# Altium PCB ProximityDetector.PcbDoc
Units mm, origin at the board's own origin, x right, y up, seen from the top; angles counter-clockwise.
Board outline 150.24 x 150.5 mm, 2 copper layers (Top Layer, Bottom Layer); 12 components, 9 nets, 33 pads, 1 vias.
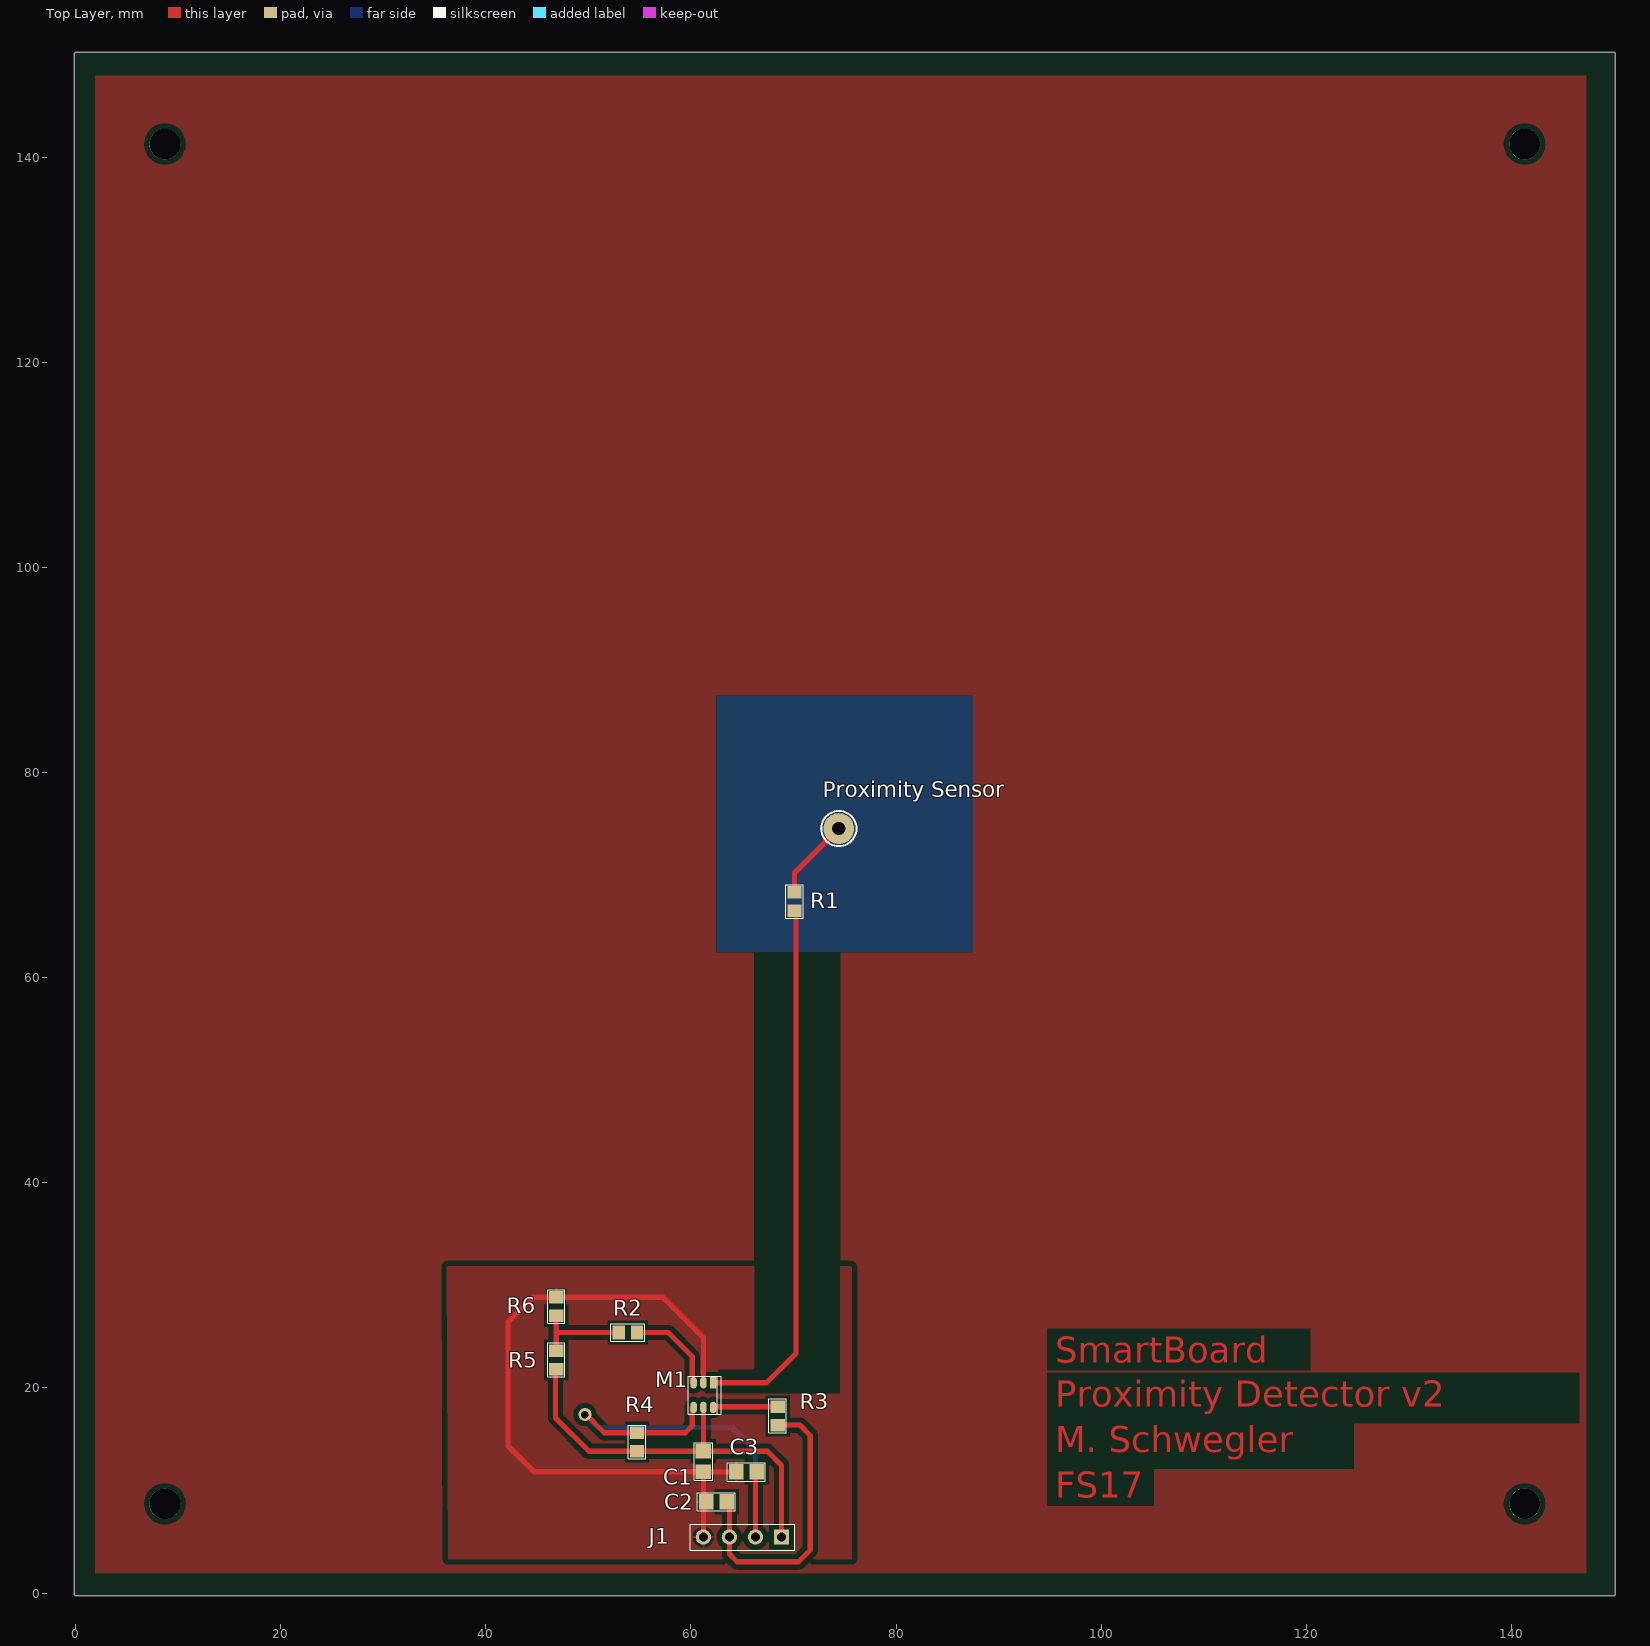
[diagram p0: Top Layer view]
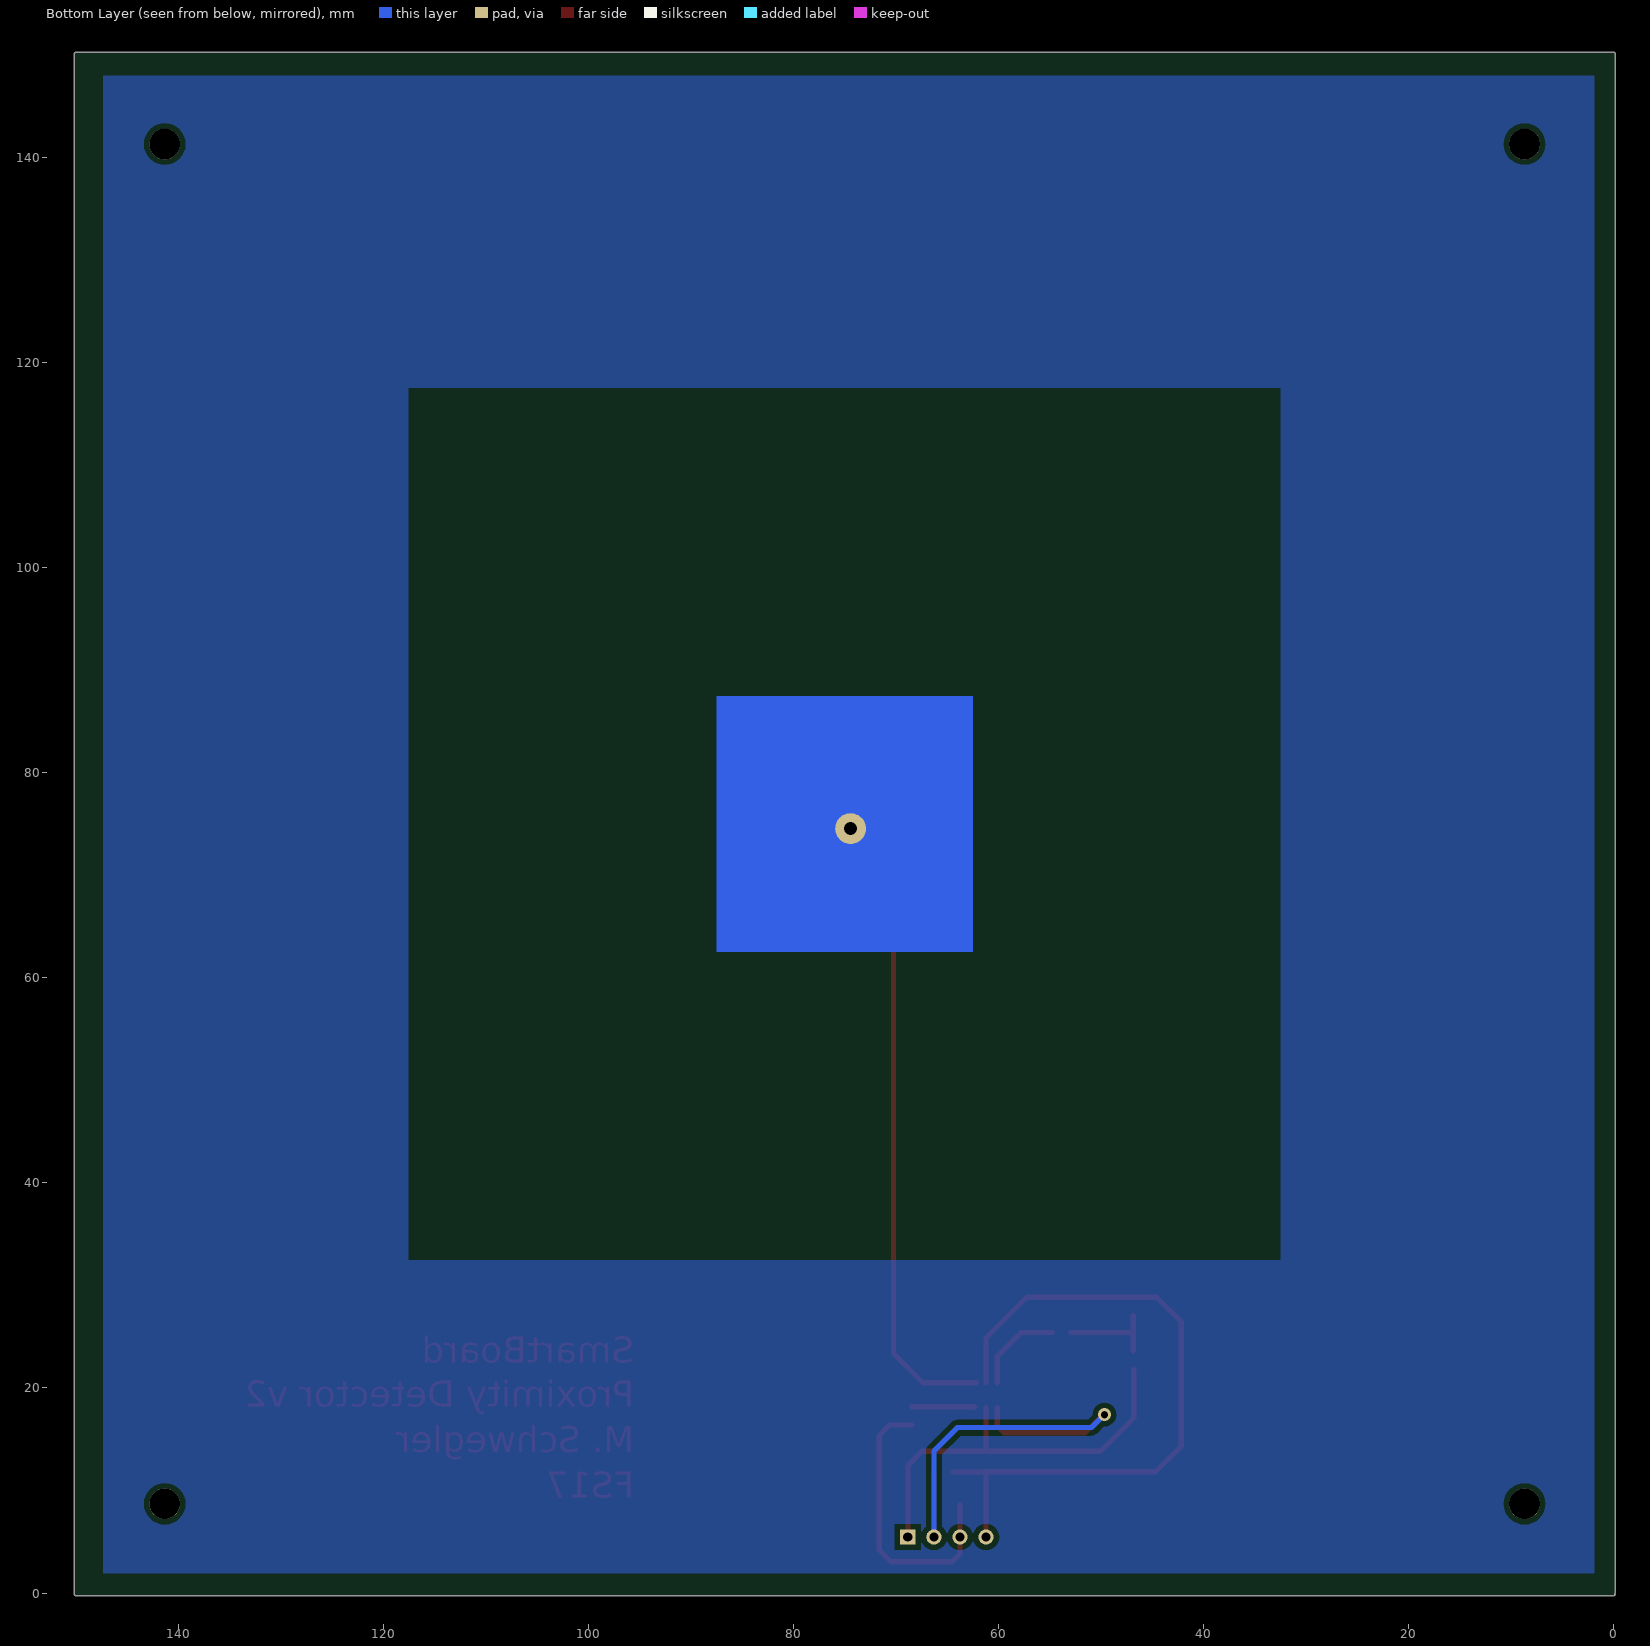
[diagram p1: Bottom Layer view, seen from below]
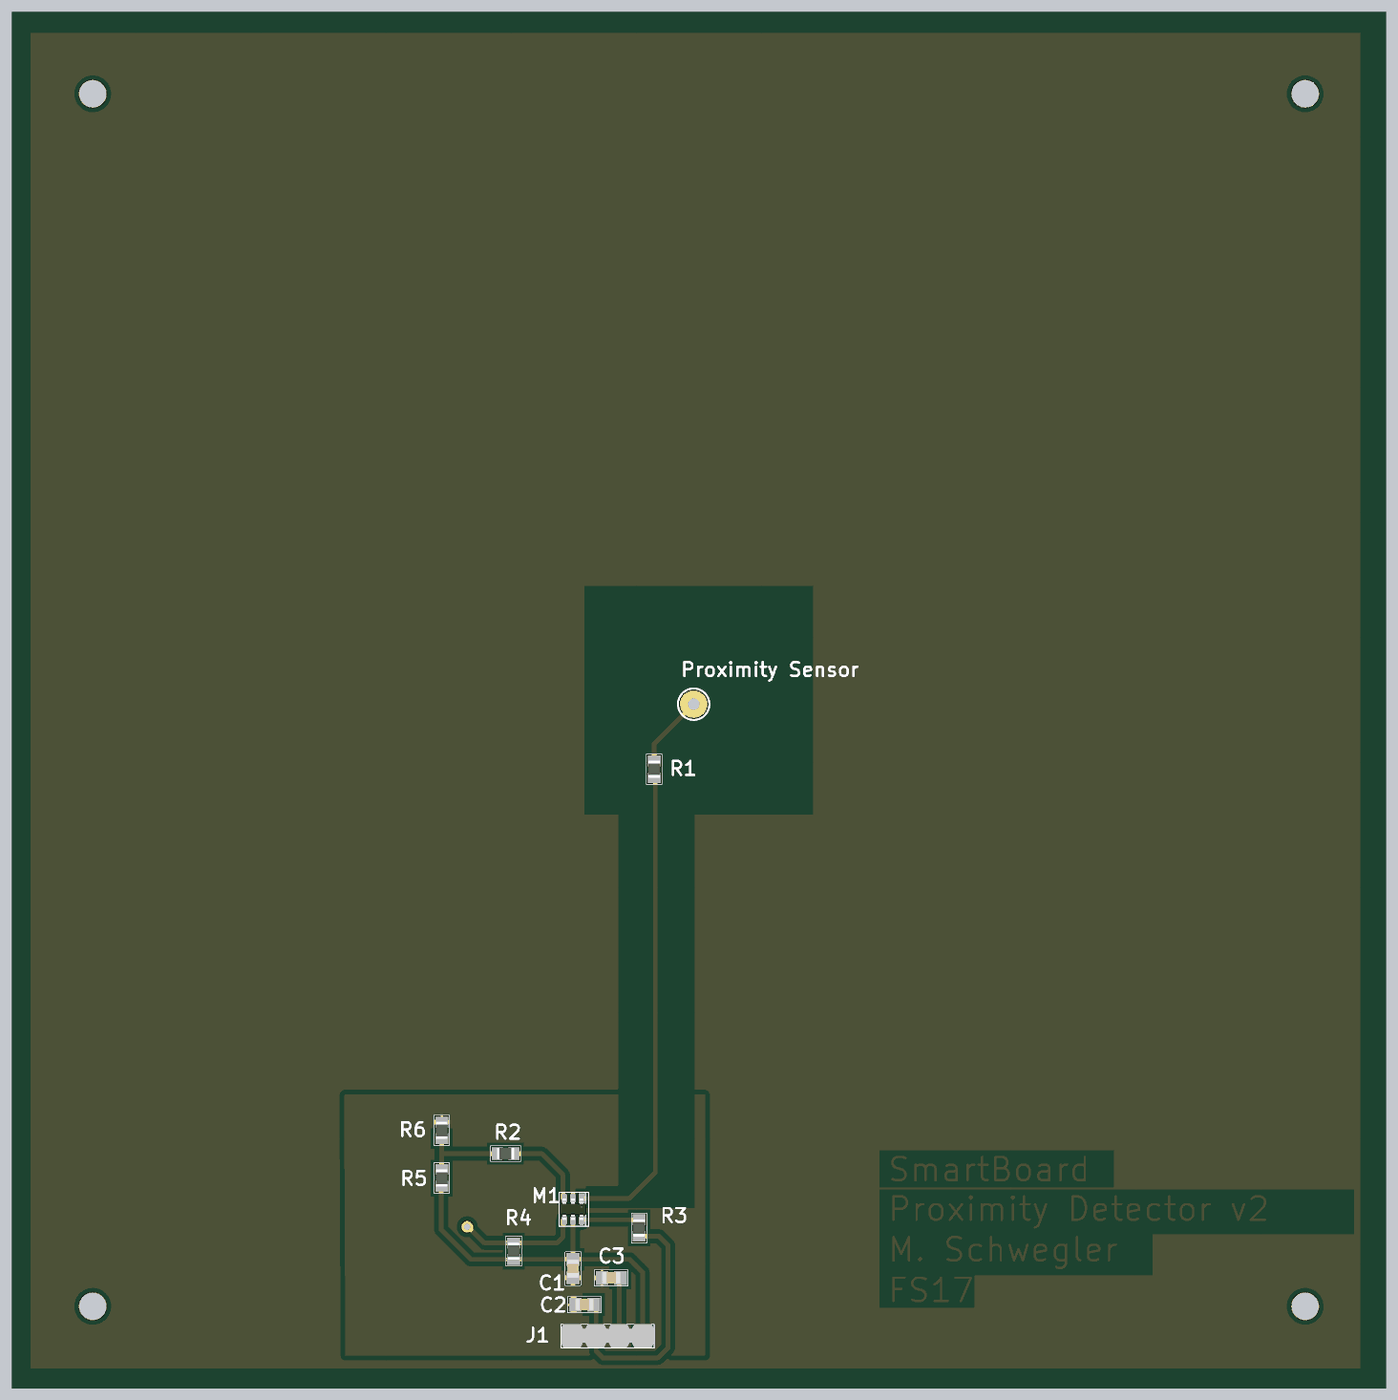
[diagram p2: 3D render of the assembled board from above, using the file's embedded part models]

## Layer stack, top to bottom
Top Solder: solder mask 0.0102, Solder Resist, Dk 3.5
Top Layer: signal copper 0.0356
Dielectric 1: dielectric 0.32, FR-4, Dk 4.8
Bottom Layer: signal copper 0.0356
Bottom Solder: solder mask 0.0102, Solder Resist, Dk 3.5

## Board outline
-0.11,-0.064 cw(c0,0) -0.127,0 -0.127,150.114 cw(c0,150.114) 0,150.241 149.987,150.241 cw(c149.987,150.114) 150.114,150.114 150.114,-0.127 cw(c149.987,-0.127) 149.987,-0.254 0,-0.254 cw(c0,-0.127)

## Design rules (kind name [scope] priority, off if disabled: settings)
Clearance [All] p1: gap=0.508
PolygonConnect [All] p1: connectstyle=Relief reliefconductorwidth=0.254 reliefentries=4 polygonreliefangle="90 Angle" airgapwidth=0.254
RoomDefinition ProximityDetector [InComponentClass('ProximityDetector')] p1: confinementstyle=ConfineIn formatcopy=TRUE lockcomponents=FALSE outline 0,0 149.987,0 149.987,149.987 0,149.987
RoutingVias [All] p1: holewidth=0.711 width=1.27 viastyle="Through Hole" minholewidth=0.711 minwidth=1.27 maxholewidth=0.711 maxwidth=1.27
SolderMaskExpansion [All] p1: expansion=0.102
UnpouredPolygon [All] p1: allowunpoured=FALSE
Width [All] p1: maxlimit=0.508 minlimit=0.508 preferedwidth=0.508
29 further rules are at their usual default settings.

## Components (designator, comment, footprint, x,y, rotation, side; value= is the part's Value field where it differs from the comment)
C1 "100n" 0805_C 61.214,12.827 r90 top
C2 "10p" 0805_C 62.484,8.89 r0 top
C3 "10p" 0805_C 65.405,11.811 r0 top
J1 "Value" CON_THT_4P_RM2.54 65.024,5.461 r180 top
M1 "MTCH101" SOT23-6 61.214,19.304 r270 top
"Proximity Sensor" "Detector" Hole_1.3mm 74.422,74.549 r90 top
R1 "4.7k" 0805_R 70.104,67.437 r270 top
R2 "10k" 0805_R 53.848,25.4 r0 top
R3 "4.7k" 0805_R 68.453,17.272 r270 top
R4 "4.7k" 0805_R 54.737,14.732 r270 top
R5 "220k" 0805_R 46.863,22.733 r270 top
R6 "220k" 0805_R 46.863,27.94 r270 top

## Footprints (in the part's own frame and the unit in brackets; to place one, negate y for a bottom-side part, rotate by r counter-clockwise, add the part's x,y. Pads: shape width x height; smd on the part's side, far side on the other; paste and mask are expansions set on the pad)
0805_C [mm] "Chip Capasitor - 0805 Medium"
  rect 1.4x1.5 smd: 1(-1,0) 2(1,0)
  silkscreen extent -1.85,-0.89 1.84,0.87, body extent -1,-0.62 1,0.62, height 0.59
0805_R [mm] "Chip Resistor - 0805 Normal"
  rect 1.2x1.4 smd: 1(-0.9,0) 2(0.9,0)
  silkscreen extent -1.65,-0.85 1.65,0.85, body extent -0.95,-0.65 0.95,0.65, height 0.63
CON_THT_4P_RM2.54 [mm] "Connector; Header; 6 Position"
  rect 1.5x1.5 hole 0.9: 1(-3.81,0)
  round 1.5 hole 0.9: 2(-1.27,0) 3(1.27,0) 4(3.81,0)
  silkscreen extent -5.08,-1.27 5.09,1.3, body extent -5.05,-1.3 5.11,1.24, height 9.27
Hole_1.3mm [mm] "Mechanical hole, 1.3 mm, 3 mm pad appature"
  round 3 hole 1.3: 1(0,0)
  silkscreen extent -1.72,-1.72 1.72,1.72
SOT23-6 [mm] "SOT23, 6-Leads, Body 2.9x1.6mm, Pitch 0.95mm, Lead Span 2.8mm, IPC Medium Density"
  rect 1.1x0.65 smd: 1(-1.2,0.95)
  oval 1.1x0.65 smd: 2(-1.2,0) 3(-1.2,-0.95) 4(1.2,-0.95) 5(1.2,0) 6(1.2,0.95)
  silkscreen extent -1.85,-1.49 1.85,1.75, body extent -1.19,-1.46 1.15,1.47, height 1

## Part data
C1 C2 C3: library part Cap, "Cap"
J1: library part CON_4P
R1 R2 R3 R4 R5 R6: library part Res, "Res"

## Free pads (board coordinates)
  round 3 hole 3: 1(8.7,8.7) 1(8.7,141.3) 1(141.3,8.7) 1(141.3,141.3)

## Via types
v1: diameter 1.27, hole 0.711, Top Layer to Bottom Layer, 1 vias

## Nets (pads, with @x,y where several pads share a name; then routed paths per layer and width w, separated by ;. In a path a pad name is that pad's centre, name@x,y a point inside that pad or via, vN(x,y) a via of type N, cw(c..) or ccw(c..) an arc to the next point about the centre after c; other vN are vias at no path point)
3V3: C1.2 J1.1 M1.5 R4.2 R5.2 | length 39.9
  Top Layer w0.508: R5.2@46.799,21.769 46.799,17.081 50.049,13.832 R4.2 ; R4.2@54.742,13.827 C1.2 ; M1.5 C1.2 ; J1.1 68.834,12.446 67.453,13.827 C1.2
GND: C1.1 C2.1 C3.1 J1.4 M1.2 R6.1 | length 68
  Top Layer w0.508: J1.4@61.214,5.223 61.214,7.874 C1.1 ; M1.2 61.214,24.892 57.266,28.84 R6.1 44.588,28.84 42.164,26.416 42.164,14.351 44.688,11.827 C1.1 ; C3.1 61.23,11.811 C1.1
MTCH101_OUT: C3.2 J1.2 M1.4 R4.1 | length 46.2
  Top Layer w0.508: v1@49.657,17.526 51.551,15.632 R4.1 59.447,15.632 60.127,16.312 M1.4@60.127,18.104 ; J1.2 C3.2@66.294,11.811
  Bottom Layer w0.508: v1(49.657,17.399) 50.927,16.129 64.008,16.129 66.294,13.843 J1.2
MTCH101_POWERMODE: C2.2 J1.3 R3.2 | length 28.2
  Top Layer w0.508: C2.2@63.754,8.62 J1.3 63.754,3.81 64.516,3.048 70.485,3.048 71.628,4.191 71.628,15.367 70.623,16.372 R3.2
NetM1_1: M1.1 R1.2 | length 52.3
  Top Layer w0.508: M1.1 67.367,20.504 70.231,23.368 R1.2@70.231,66.41
NetM1_3: M1.3 R2.2 | length 8.9
  Top Layer w0.508: R2.2 57.785,25.4 60.127,23.058 M1.3@60.127,20.504
NetM1_6: M1.6 R3.1 | length 6.2
  Top Layer w0.508: M1.6@62.301,18.104 62.369,18.172 R3.1
"NetProximity Sensor_1": "Proximity Sensor.1" R1.1 | length 8
  Top Layer w0.508: R1.1 70.104,70.231 74.422,74.549
NetR2_1: R2.1 R5.1 R6.2 | length 9.5
  Top Layer w0.508: R5.1 46.863,25.4 ; R6.2 46.863,25.4 ; R2.1 46.863,25.4

## Polygon pours and split planes (outlines as drawn)
no net on Top Layer "Top Layer-No Net" (solid, pour order 6): 1.905,1.905 147.32,1.905 147.32,147.955 1.905,147.955
GND on Top Layer "Top Layer-No Net" (solid, pour order 4): 36.322,3.302 75.692,3.302 75.692,22.987 75.692,31.877 36.195,31.877
no net on Bottom Layer "Top Layer-No Net" (solid, pour order 8): 1.905,1.905 147.32,1.905 147.32,147.955 1.905,147.955 1.905,147.828

## Other copper
Top Layer:
  pour cut-out: 62.484,62.484 87.503,62.484 87.503,87.503 62.484,87.503
  pour cut-out: 62.611,19.431 68.789,19.431 68.789,21.844 62.611,21.844
  pour cut-out: 66.167,19.431 74.549,19.431 74.549,67.564 66.167,67.564
  text "SmartBoard" at 95.504,22.479 h2.54
  text "Proximity Detector v2" at 95.504,18.161 h2.54
  text "M. Schwegler" at 95.504,13.716 h2.54
  text "FS17" at 95.504,9.271 h2.54
Bottom Layer:
  rectangle net "NetProximity Sensor_1": 62.5,62.5 87.5,87.5
  pour cut-out: 32.5,32.5 117.5,32.5 117.5,117.5 32.5,117.5

## Silkscreen, mask and mechanical layers (free items; w line width, h text height)
Mechanical 1:
  lines w0.508: 0,-0.127 149.987,-0.127 149.987,150.114 0,150.114 0,0